# Altium PCB PCB1.PcbDoc
Units mil, origin at the board's own origin, x right, y up, seen from the top; angles counter-clockwise.
Board outline 6000 x 4000 mil, 2 copper layers (Top Layer, Bottom Layer); 9 components, 0 nets, 216 pads, 0 vias.
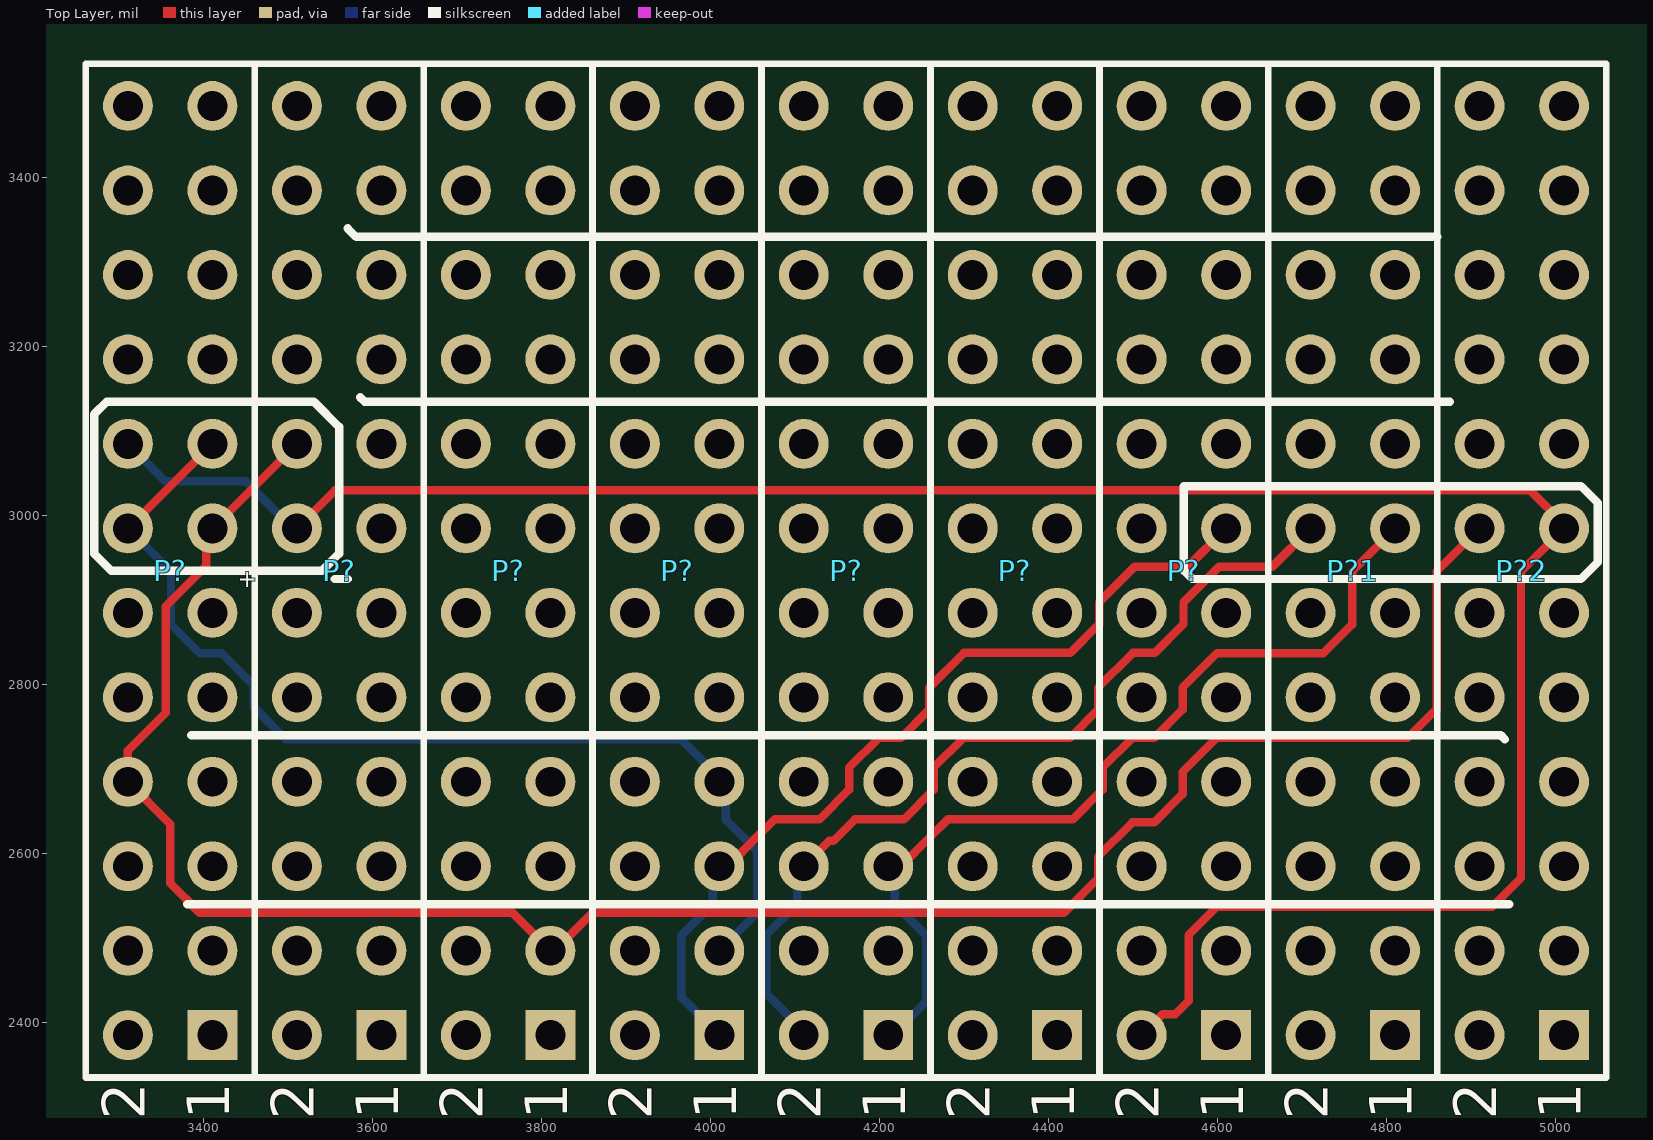
[diagram p0: Top Layer view]
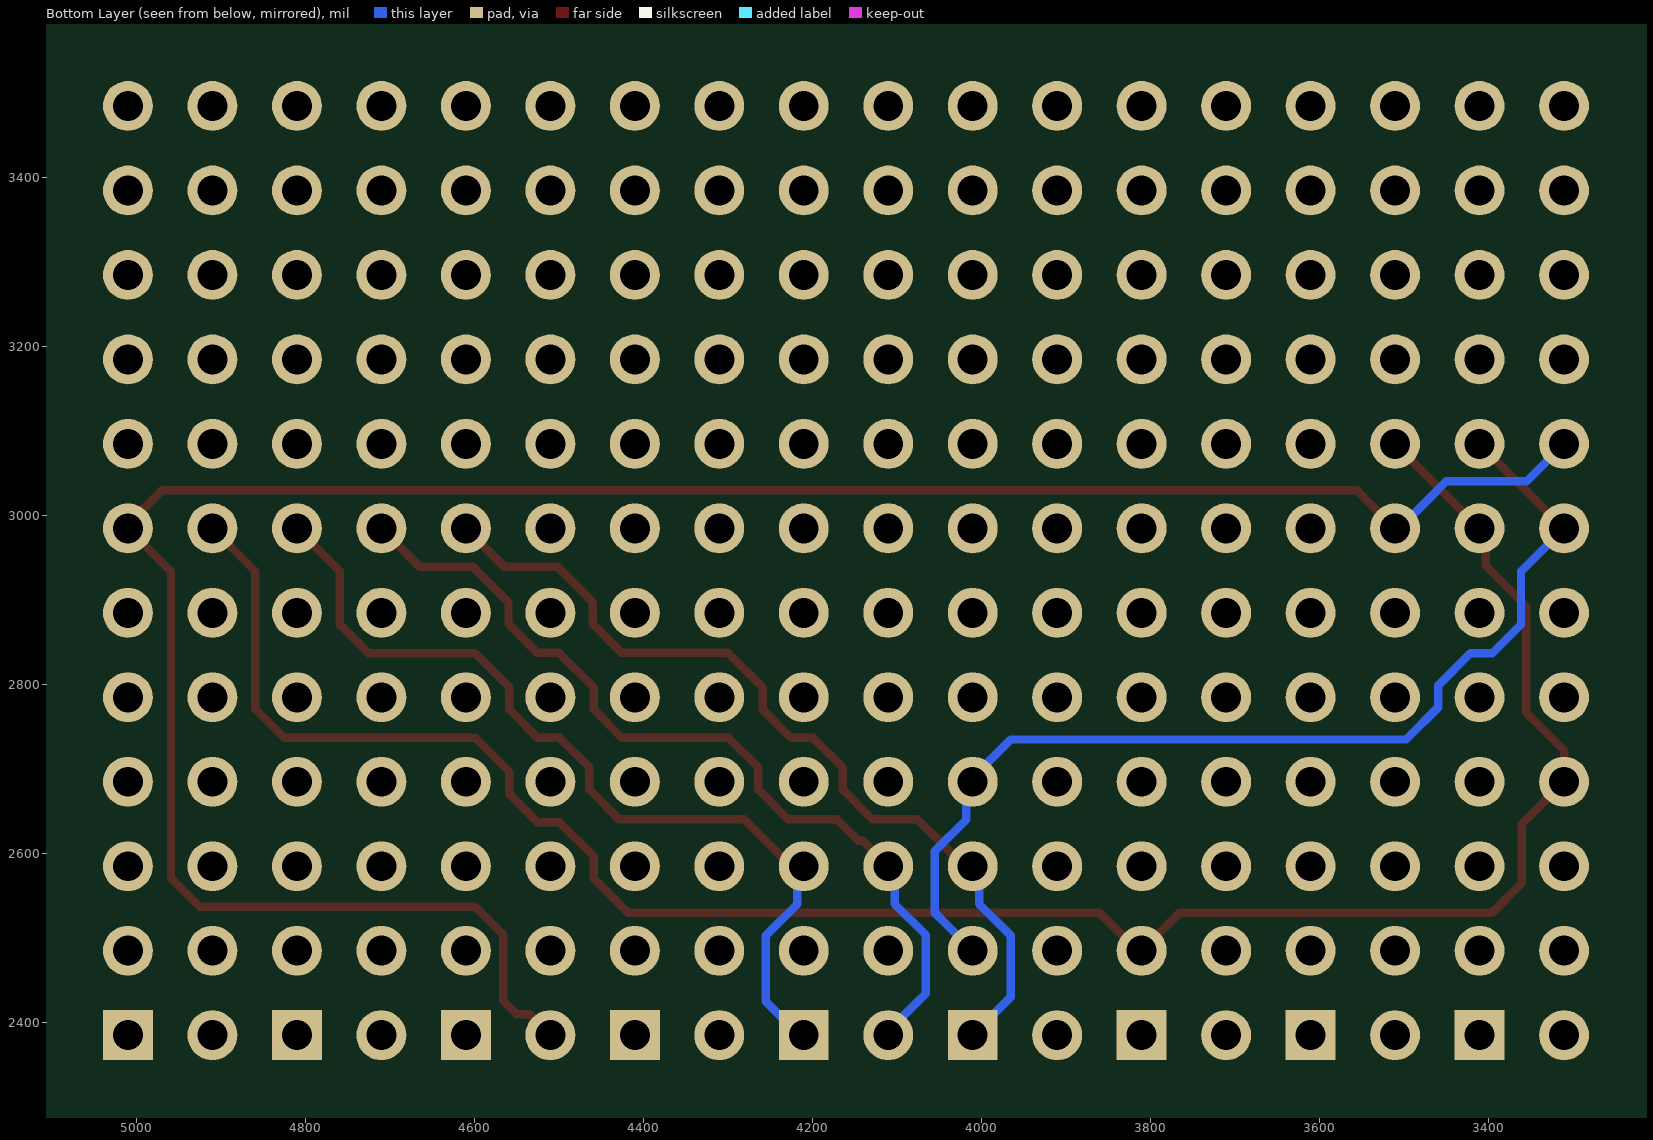
[diagram p1: Bottom Layer view, seen from below]

## Layer stack, top to bottom
Top Solder: solder mask 0.4, Solder Resist, Dk 3.5
Top Layer: signal copper 1.4
Dielectric 1: dielectric 12.6, FR-4, Dk 4.8
Bottom Layer: signal copper 1.4
Bottom Solder: solder mask 0.4, Solder Resist, Dk 3.5

## Board outline
1000,1000 7000,1000 7000,5000 1000,5000

## Design rules (kind name [scope] priority, off if disabled: settings)
Clearance [All] p1: gap=10 ignorepadtopadclearanceinfootprint=FALSE except(0: Arc-Hole Track-Hole SMDPad-Hole THPad-Hole Via-Hole Fill-Hole Poly-Hole Region-Hole Text-Hole)
PolygonConnect [All] p1: connectstyle=Relief reliefconductorwidth=10 reliefentries=4 polygonreliefangle="90 Angle" airgapwidth=10
RoomDefinition Sheet1 [InComponentClass('Sheet1')] p1: confinementstyle=ConfineIn formatcopy=TRUE lockcomponents=FALSE outline 3225,2300 5090,2300 5090,3555 3225,3555
RoutingVias [All] p1: holewidth=28 width=50 viastyle="Through Hole" minholewidth=28 minwidth=50 maxholewidth=28 maxwidth=50
SolderMaskExpansion [All] p1: expansion=4
Width [All] p1: maxlimit=10 minlimit=10 preferedwidth=10
30 further rules are at their usual default settings.

## Classes and differential pairs
component class Sheet1: P?

## Components (designator, comment, footprint, x,y, rotation, side; value= is the part's Value field where it differs from the comment)
P? "Header 14X2" HDR2X12 3610,2385 r90 top
P? "Header 14X2" HDR2X12 3410,2385 r90 top
P? "Header 14X2" HDR2X12 3810,2385 r90 top
P? "Header 14X2" HDR2X12 4610,2385 r90 top
P? "Header 14X2" HDR2X12 4410,2385 r90 top
P? "Header 14X2" HDR2X12 4010,2385 r90 top
P? "Header 14X2" HDR2X12 4210,2385 r90 top
P?1 "Header 14X2" HDR2X12 4810,2385 r90 top (schematic designator P?)
P?2 "Header 14X2" HDR2X12 5010,2385 r90 top (schematic designator P?)

## Footprints (in the part's own frame and the unit in brackets; to place one, negate y for a bottom-side part, rotate by r counter-clockwise, add the part's x,y. Pads: shape width x height; smd on the part's side, far side on the other; paste and mask are expansions set on the pad)
HDR2X12 [mm] "Connector; Header; 12x2 Position"
  rect 1.5x1.5 hole 0.9: 1(0,0)
  round 1.5 hole 0.9: 2(0,2.54) 3(2.54,0) 4(2.54,2.54) 5(5.08,0) 6(5.08,2.54) 7(7.62,0) 8(7.62,2.54) 9(10.16,0) 10(10.16,2.54) 11(12.7,0) 12(12.7,2.54) 13(15.24,0) 14(15.24,2.54) 15(17.78,0) 16(17.78,2.54) 17(20.32,0) 18(20.32,2.54) 19(22.86,0) 20(22.86,2.54) 21(25.4,0) 22(25.4,2.54) 23(27.94,0) 24(27.94,2.54)
  silkscreen extent -1.27,-1.27 29.21,3.81

## Part data
P? P? P? P? P? P? P? P?1 P?2: "Header, 14-Pin, Dual row", LatestRevisionDate=17-Jul-2002, LatestRevisionNote="Re-released for DXP Platform.", Publisher="Altium Limited"

## Nets (pads, with @x,y where several pads share a name; then routed paths per layer and width w, separated by ;. In a path a pad name is that pad's centre, name@x,y a point inside that pad or via, vN(x,y) a via of type N, cw(c..) or ccw(c..) an arc to the next point about the centre after c; other vN are vias at no path point)
pads on no net: P?1.1 P?1.2 P?1.3 P?1.4 P?1.5 P?1.6 P?1.7 P?1.8 P?1.9 P?1.10 P?1.11 P?1.12 P?1.13 P?1.14 P?1.15 P?1.16 P?1.17 P?1.18 P?1.19 P?1.20 P?1.21 P?1.22 P?1.23 P?1.24 P?2.1 P?2.2 P?2.3 P?2.4 P?2.5 P?2.6 P?2.7 P?2.8 P?2.9 P?2.10 P?2.11 P?2.12 P?2.13 P?2.14 P?2.15 P?2.16 P?2.17 P?2.18 P?2.19 P?2.20 P?2.21 P?2.22 P?2.23 P?2.24 P?.1 P?.2 P?.3 P?.4 P?.5 P?.6 P?.7 P?.8 P?.9 P?.10 P?.11 P?.12 P?.13 P?.14 P?.15 P?.16 P?.17 P?.18 P?.19 P?.20 P?.21 P?.22 P?.23 P?.24
copper on no net: | length 9831.6
  Top Layer w10: 3310,2985 3410,3085 ; 3505,3085 3510,3085 ; 3507.5,3082.5 3507.5,3085 ; 3507.5,3083.75 3508.75,3083.75 3410,2985 3410,2969.84 3402.5,2962.34 3402.5,2940.47 3354.53,2892.5 3354.53,2766.56 3310,2722.03 3310,2685 3360,2635 3360,2565 3395,2530 3765,2530 ; 3510,2985 3555,3030 4970,3030 5010,2990 5010,2985 4959.06,2934.06 4959.06,2571.08 4925.24,2537.26 4599.29,2537.26 4565.47,2503.44 4565.47,2425.47 4550,2410 4535,2410 4510,2385 ; 4010,2585 4020,2585 4055,2620 4075.47,2640.47 4128.44,2640.47 4163.73,2675.76 4163.73,2701.7 4199.02,2736.99 4224.96,2736.99 4258.51,2770.54 4258.51,2796.49 4299.53,2837.5 4425.47,2837.5 4459.53,2871.56 4459.53,2897.5 4501.56,2939.53 4564.53,2939.53 4610,2985 ; 4110,2585 4140,2615 4145,2615 4170.47,2640.47 4228.44,2640.47 4263.73,2675.76 4263.73,2701.7 4299.02,2736.99 4424.96,2736.99 4458.51,2770.54 4458.51,2796.49 4499.53,2837.5 4525.47,2837.5 4559.53,2871.56 4559.53,2897.5 4601.56,2939.53 4664.53,2939.53 4710,2985 ; 4210,2585 4225,2585 4260,2620 4280.47,2640.47 4428.44,2640.47 4463.7,2675.73 4463.7,2701.67 4498.96,2736.93 4524.91,2736.93 4558.4,2770.42 4558.4,2796.37 4599.29,2837.26 4725.24,2837.26 4759.06,2871.08 4759.06,2934.06 4810,2985 ; 4510,2485 4515,2485 ; 4910,2985 4859.06,2934.06 4859.06,2771.08 4825.24,2737.26 4599.29,2737.26 4558.4,2696.37 4558.4,2670.42 4524.91,2636.93 4498.96,2636.93 4458.47,2596.44 4458.47,2570.5 4417.97,2530 3860,2530 3815,2485 3810,2485 ; 3765,2530 3810,2485 ; 3765,2530 3810,2485
  Bottom Layer w10: 3310,2985 3360.94,2934.06 3360.94,2871.08 3394.76,2837.26 3420.71,2837.26 3458.87,2799.1 3458.87,2773.16 3497.03,2735 3965,2735 4010,2690 4010,2685 4010,2669.84 4017.5,2662.34 4017.5,2640.47 4055,2602.97 4055,2530 4041.49,2516.49 4010,2485 ; 3310,3085 3354.53,3040.47 3449.53,3040.47 3470,3020 3505,2985 3510,2985 ; 4010,2385 3965,2430 3965,2502.97 4002.5,2540.47 4002.5,2577.5 4010,2585 ; 4110,2385 4110,2390 4075,2425 4065.47,2434.53 4065.47,2503.44 4102.5,2540.47 4102.5,2577.5 4110,2585 ; 4210,2385 4215,2385 4255,2425 4255,2502.97 4217.5,2540.47 4217.5,2577.5 4210,2585

## Silkscreen, mask and mechanical layers (free items; w line width, h text height)
Top Overlay:
  lines w10: 3380,2540 4945,2540 ; 3385,2740 4935,2740 4940,2735 ; 3555,2925 3570,2925 ; 3570,3340 3580,3330 4860,3330 ; 3585,3140 3590,3135 4875,3135 ; 3270,2955 3270,3120 3285,3135 3530,3135 3560,3105 3560,2955 3540,2935 3290,2935 3270,2955 ; 4560,2935 4560,3035 5030,3035 5050,3015 5050,2945 5030,2925 4570,2925 4560,2935
  text "+" at 3440,2915 h20
Mechanical 1:
  lines w10: 3225,2355 3225,3515 3225,3520 3260,3555 5055,3555 5085,3525 5085,2355 5040,2310 4660,2310 3270,2310 3225,2355

## Text inside footprints (layer, text, board x,y; h text height)
P?: Top Overlay "2" at 3530,2285 h50 r90; Top Overlay "1" at 3630,2285 h50 r90; Top Overlay "27" at 3630,3745 h50 r90; Top Overlay "28" at 3530,3745 h50 r90
P?: Top Overlay "2" at 3330,2285 h50 r90; Top Overlay "1" at 3430,2285 h50 r90; Top Overlay "27" at 3430,3745 h50 r90; Top Overlay "28" at 3330,3745 h50 r90
P?: Top Overlay "2" at 4130,2285 h50 r90; Top Overlay "1" at 4230,2285 h50 r90; Top Overlay "27" at 4230,3745 h50 r90; Top Overlay "28" at 4130,3745 h50 r90
P?: Top Overlay "2" at 3930,2285 h50 r90; Top Overlay "1" at 4030,2285 h50 r90; Top Overlay "27" at 4030,3745 h50 r90; Top Overlay "28" at 3930,3745 h50 r90
P?: Top Overlay "2" at 3730,2285 h50 r90; Top Overlay "1" at 3830,2285 h50 r90; Top Overlay "27" at 3830,3745 h50 r90; Top Overlay "28" at 3730,3745 h50 r90
P?: Top Overlay "2" at 4330,2285 h50 r90; Top Overlay "1" at 4430,2285 h50 r90; Top Overlay "27" at 4430,3745 h50 r90; Top Overlay "28" at 4330,3745 h50 r90
P?: Top Overlay "2" at 4530,2285 h50 r90; Top Overlay "1" at 4630,2285 h50 r90; Top Overlay "27" at 4630,3745 h50 r90; Top Overlay "28" at 4530,3745 h50 r90
P?1: Top Overlay "28" at 4730,3745 h50 r90; Top Overlay "27" at 4830,3745 h50 r90; Top Overlay "1" at 4830,2285 h50 r90; Top Overlay "2" at 4730,2285 h50 r90
P?2: Top Overlay "28" at 4930,3745 h50 r90; Top Overlay "27" at 5030,3745 h50 r90; Top Overlay "1" at 5030,2285 h50 r90; Top Overlay "2" at 4930,2285 h50 r90